# Altium PCB CH32F&V208W-R0.PcbDoc (part 2 of 3)
Units mm, origin at the board's own origin, x right, y up, seen from the top; angles counter-clockwise.
Board outline 86.5 x 95 mm, 2 copper layers (Top Layer, Bottom Layer); 65 components, 96 nets, 363 pads, 852 vias.
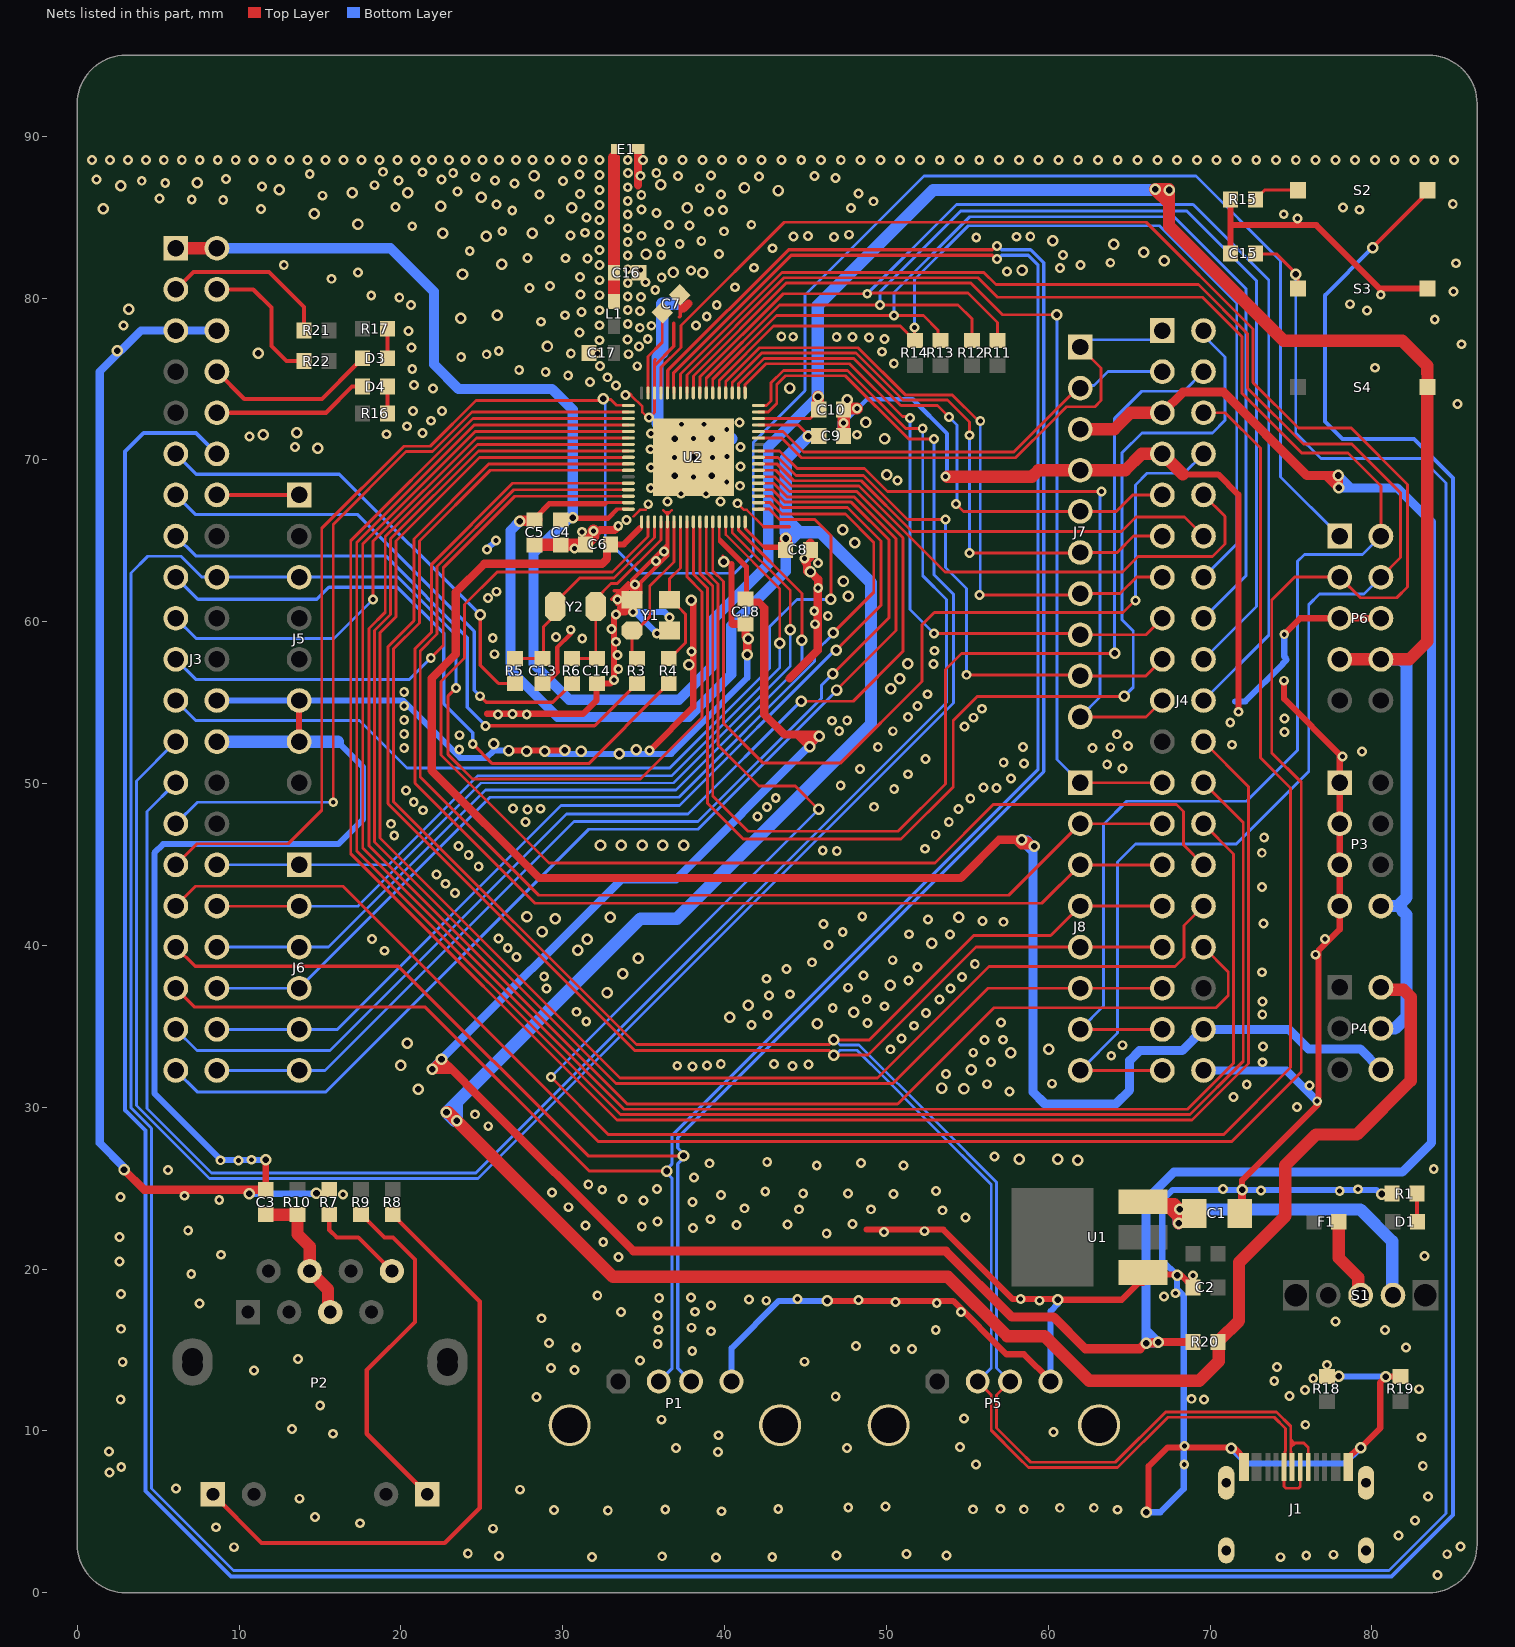
[diagram p2: the nets of this part, all layers, seen from the top]

## Via types
v1: diameter 0.61, hole 0.305, Top Layer to Bottom Layer, tented both sides, 680 vias
v2: diameter 0.711, hole 0.406, Top Layer to Bottom Layer, tented both sides, 172 vias

## Nets (pads, with @x,y where several pads share a name; then routed paths per layer and width w, separated by ;. In a path a pad name is that pad's centre, name@x,y a point inside that pad or via, vN(x,y) a via of type N, cw(c..) or ccw(c..) an arc to the next point about the centre after c; other vN are vias at no path point) (continued)
GND: C1.2 C2.2 C3.1 C4.2 C5.1 C6.2 C7.2 C8.2 C9.2 C10.1 C13.1 C14.1 C15.1 C16.1 C17.1 C18.2 E1.0 J1.0 J1.A1 J1.B1 J3.5 J3.6 J3.24 J3.26 J4.7 J4.38 J5.6 J5.7 J7.4 P1.0 P1.4 P3.1 P3.3 P3.5 P3.7 P5.0 P5.4 P6.5 P6.6 R1.1 R7.1 R15.1 R18.2 R19.2 S3.1 U1.1 U2.0 U2.5 U2.49 Y1.2 Y1.4 | length 514.3
  Top Layer w0.152: v1@34.149,74.1 34.22,74.029 34.22,73.983 34.917,73.286 34.917,72.942 35.248,72.611 v1(35.321,72.611) ; 34.35,66.5 34.359,66.5 34.766,66.907 35.135,66.907 ; 36.217,66.878 36.343,66.752 ; 36.352,66.761 36.343,66.752 ; 36.352,66.777 36.477,66.777 ; U2.5@36.468,66.186 36.468,66.627 36.343,66.752 ; 36.603,66.777 36.477,66.777 ; 36.728,66.887 36.477,66.636 36.477,66.777 ; U2.0@38.068,70.156 U2.0@39.211,69.012 U2.0@39.268,68.956 ; 39.884,64.086 40.419,63.551 ; 40.419,59.94 40.508,59.851 ; v1(40.79,67.317) 41.2,66.907 41.369,66.907 42.401,65.875
  Top Layer w0.178: 35.623,72.883 35.668,72.927
  Top Layer w0.203: 33.03,61.392 33.551,61.913 ; v1@33.164,61.513 33.321,61.513 34.027,62.219 v1@34.269,62.219 ; 33.172,61.913 33.551,61.913 ; v1(33.379,61.362) 33.411,61.362 v1@34.269,62.219 ; 34.046,62.408 33.551,61.913 ; 35.668,72.927 U2.49@35.668,74.138 ; U2.49@35.668,74.436 35.668,75.829 ; 35.712,76.207 35.668,76.162 35.668,75.829 ; 36.852,78.462 36.852,77.013 35.668,75.829 ; 37.198,78.825 37.255,78.882 37.255,79.086 ; 42.401,65.875 43.991,65.875 ; v1@34.269,62.219 34.283,62.234 34.346,62.297 v1(34.451,62.297) 34.373,62.219 34.283,62.219 v1@34.269,62.219 ; 37.255,79.086 C7.2@37.255,79.661 ; 37.255,79.086 37.455,79.286 37.455,79.358 37.455,79.461 C7.2@37.255,79.661 ; C7.2@37.255,79.661 37.238,79.679 C7.2@37.238,80.193 37.255,80.175 C7.2@37.255,79.661
  Top Layer w0.254: C13.1@28.757,56.185 C13.1@28.782,56.185 ; 29.656,58.414 v1@30.492,59.25 ; Y1.4@34.479,61.892 34.657,62.07 34.806,62.07 ; 36.468,65.134 36.468,64.772 ; U2.5@36.468,66.173 36.468,64.772 ; 34.806,62.07 34.806,62.433 36.468,64.094 36.468,64.772 ; 34.806,62.07 34.806,61.785 34.383,61.362 34.338,61.362 34.298,61.362 Y1.4@34.283,61.362 34.283,62.219 34.283,62.234 34.283,62.588 36.468,64.772
  Top Layer w0.305: 29.656,57.059 29.656,58.414
  Top Layer w0.381: C3.1@11.645,24.905 11.649,24.909 11.649,26.743 v2(11.652,26.747) ; J5.7@13.71,52.592 J5.6@13.71,55.132 ; 25.327,54.31 31.253,54.31 32.088,55.145 32.088,56.185 C14.1@32.114,56.185 32.943,56.185 v1(33.166,56.408) 33.166,60.345 v1(33.278,60.456) v1@33.472,60.65 ; v2(26.67,52.041) 30.223,52.041 v2@30.309,52.127 ; C13.1@28.757,56.033 29.63,56.906 ; v1@33.411,61.362 Y1.4@34.042,61.362 ; v1@33.418,61.144 Y1.4@33.824,61.144 ; 33.535,60.855 Y1.4@33.824,61.144 ; Y1.4@34.298,61.362 34.338,61.402 34.338,61.362 v1(34.338,60.599) ; v1(35.366,52.039) 38.062,54.735 v2@38.062,61.382 ; 40.419,59.94 40.419,63.551 ; v2(46.331,18.033) 54.115,18.033 57.415,14.733 58.491,14.733 60.138,13.087 P5.4@60.138,13.054 ; 48.768,22.435 53.51,22.435 57.806,18.139 v1(58.295,18.139) 60.555,18.139 v2(60.591,18.103) 64.543,18.103 65.589,19.149 U1.1@65.851,19.149 ; U1.1@65.851,19.784 65.969,19.667 v2@68.11,19.667 ; v2(66.052,4.971) 66.052,5.06 66.196,5.204 66.196,7.809 67.369,8.983 71.249,8.983 v2(71.309,8.923) ; v2@68.146,19.667 68.939,18.875 C2.2@68.939,18.865 ; 68.318,69.104 70.496,69.104 71.746,67.853 v1(71.746,54.436) ; C15.1@71.266,82.754 71.266,84.505 ; R15.1@71.266,86.089 71.266,84.505 ; v2@71.57,8.86 72.091,8.338 J1.A1@72.091,7.763 ; v2(71.975,24.89) 71.975,25.485 76.616,30.125 v1(76.616,30.372) ; v1(74.568,56.356) 74.568,55.226 78.077,51.717 v1@78.077,51.673 ; v1(74.582,59.222) 75.572,60.213 80.553,60.213 P6.6@80.554,60.212 ; v1@76.688,30.606 76.688,39.655 78.014,40.982 P3.7@78.014,42.432 P3.5@78.014,44.972 P3.3@78.014,47.512 P3.1@78.014,50.052 v1@78.014,51.673 ; R18.2@77.217,13.365 77.222,13.369 77.954,13.369 v2(77.958,13.374) ; J1.B1@78.541,7.763 78.541,8.338 79.107,8.904 79.241,8.904 v2(79.304,8.967) 80.509,10.172 80.509,12.99 v2(80.864,13.345) 80.874,13.355 81.758,13.355 R19.2@81.768,13.365 ; v2(80.603,24.635) 80.618,24.65 81.234,24.65 R1.1@81.249,24.665 ; S3.1@83.423,80.582 80.48,80.582 76.557,84.505 71.266,84.505 ; v1@33.472,60.65 Y1.4@33.966,61.144 ; v1@33.472,60.65 33.538,60.584 33.876,60.584 33.876,61.002 Y1.4@34.018,61.144 ; Y1.4@33.824,61.144 Y1.4@34.042,61.362 ; Y1.4@33.824,61.144 Y1.4@33.966,61.144 ; Y1.4@33.966,61.144 Y1.4@34.018,61.144 ; Y1.4@33.966,61.144 Y1.4@34.183,61.362 ; Y1.4@34.018,61.144 34.066,61.144 Y1.4@34.283,61.362 Y1.4@34.236,61.362 ; Y1.4@34.018,61.144 Y1.4@34.236,61.362 ; Y1.4@34.042,61.362 Y1.4@34.183,61.362 ; Y1.4@34.183,61.362 Y1.4@34.236,61.362
  Top Layer w0.508: v2(2.888,26.137) 4.119,24.905 C3.1@11.645,24.905 ; v1(31.9,65.612) 31.919,65.632 32.269,65.632 32.31,65.672 33.193,65.672 v1(33.429,65.908) ; Y1.4@34.283,61.362 34.319,61.326 34.319,60.618 v1(34.338,60.599) ; 34.653,86.972 E1.0@34.653,89.204 ; C16.1@34.654,81.613 C16.1@34.705,81.561 ; 37.455,79.358 37.764,79.666 ; 40.508,59.851 C18.2@41.291,59.851 v2@41.291,59.086 ; v2(41.402,57.963) 41.402,58.9 v2(41.451,58.949) ; 44.019,56.486 45.751,58.218 45.751,62.061 v1(45.782,62.092) 45.782,62.617 v2(45.305,63.094) ; v1(44.933,63.897) 45.226,63.897 45.314,63.985 45.314,64.881 C8.2@45.298,64.897 ; v1@44.993,63.663 45.085,63.571 v2@45.085,63.094 ; C1.2@71.821,23.44 71.975,23.594 v2(71.975,24.89)
  Top Layer w0.762: C5.1@28.252,64.751 28.265,64.763 31.39,64.763 C6.2@31.403,64.776 31.403,64.801 31.9,65.298 v1(31.9,65.612) ; C9.2@47.355,71.476 v1(47.355,72.289) C10.1@47.355,73.102 47.431,73.178 v1(48.176,73.178) ; v1@53.753,68.964 58.997,68.964 59.388,69.356 J7.4@61.97,69.356 64.754,69.356 65.77,70.372 J4.7@67.05,70.372 68.318,69.104
  Bottom Layer w0.254: v1(47.355,72.289) 48.811,73.745 51.625,73.745 53.753,71.617 v1@53.753,68.964
  Bottom Layer w0.381: J3.24@8.63,55.132 J5.6@13.71,55.132 20.102,55.132 23.652,51.581 25.277,51.581 25.737,52.041 v2(26.67,52.041) ; v2(10.625,24.652) 14.754,24.652 v2(14.78,24.678) ; v2(11.652,26.747) 8.877,26.747 4.771,30.853 4.771,45.718 5.317,46.264 16.138,46.264 17.664,47.79 17.664,51.013 16.085,52.592 ; v1(25.307,64.464) 25.854,65.011 v1(25.863,65.011) ; v2@29.158,51.834 36.712,51.834 41.402,56.524 v2(41.402,57.963) ; v1@33.454,61.349 33.485,61.318 33.619,61.318 v1(34.338,60.599) v1@34.489,60.599 ; v1(35.809,59.28) v1@34.489,60.599 ; v1@36.63,60.3 36.6,60.3 36.302,60.599 v1@34.489,60.599 ; P1.4@40.427,13.054 40.427,15.114 43.346,18.033 v2(46.331,18.033) ; P5.4@60.138,13.054 60.138,17.387 60.591,17.841 v2(60.591,18.103) ; v2(66.052,4.971) 66.93,4.971 68.37,6.41 68.37,18.35 67.958,18.762 v2(67.958,19.604) 67.046,20.516 67.046,24.251 67.685,24.89 v2(71.975,24.89) 80.27,24.89 80.525,24.635 v2(80.603,24.635) ; v2(71.309,8.923) 72.24,7.992 78.329,7.992 v2(79.304,8.967) ; 71.539,55.073 72.175,55.073 74.507,57.406 74.507,57.43 74.727,57.65 ; v1(74.582,59.222) 74.582,57.844 74.696,57.73 ; v2(77.958,13.374) 77.973,13.359 80.849,13.359 v2(80.864,13.345)
  Bottom Layer w0.508: v2(2.888,26.137) 2.888,26.282 1.388,27.781 1.388,75.45 3.93,77.992 J3.5@6.09,77.992 J3.6@8.63,77.992 ; J4.38@69.59,32.272 74.716,32.272 v1(76.616,30.372)
  Bottom Layer w0.762: J3.26@8.63,52.592 J5.7@13.71,52.592 16.085,52.592 ; 35.857,72.249 35.857,76.347 36.138,76.628 36.138,79.645 37.048,79.645 ; U2.0@39.211,71.299 40.41,71.299 ; 47.355,71.882 v1(47.355,72.289)
  other v1: 84.049,1.094 39.472,2.178 74.354,2.195 31.796,2.211 42.943,2.205 26.061,2.259 36.143,2.251 46.914,2.289 53.717,2.289 75.938,2.311 77.619,2.349 51.246,2.4 84.649,2.38 24.13,2.428 9.676,2.812 85.471,2.857 81.647,3.528 25.694,3.956 8.574,4.044 17.475,4.292 82.656,4.46 14.699,4.679 39.804,5.036 32.782,5.073 29.456,5.11 64.275,5.125 36.33,5.146 55.348,5.155 58.486,5.155 43.315,5.183 57.054,5.186 47.639,5.257 60.71,5.247 62.813,5.247 49.931,5.331 13.73,5.81 83.472,5.936 27.349,6.366 6.108,6.439 2.002,7.432 2.717,7.77 83.142,7.839 55.53,7.928 68.399,7.934 39.582,8.694 1.962,8.723 36.995,8.953 47.565,8.953 54.555,8.994 68.422,9.075 83.064,9.606 39.619,9.729 15.791,9.821 60.321,9.937 13.266,10.122 75.882,10.378 36.108,10.69 54.799,10.762 15.01,11.564 2.683,11.935 69.614,11.94 68.854,11.982 28.38,12.088 46.863,12.132 74.915,12.146 75.86,12.516 82.909,12.577 73.961,13.08 76.372,13.234 10.922,13.729 30.724,13.758 29.262,13.885 74.13,13.945 77.217,14.084 2.806,14.255 44.941,14.275 34.775,14.355 13.627,14.45 38,14.937 50.533,15.058 51.569,15.058 82.092,15.144 30.831,15.159 48.12,15.236 35.865,15.372 29.158,15.42 39.149,16.155 53.045,16.243 80.813,16.224 35.911,16.25 2.704,16.308 37.945,16.376 77.742,16.765 28.674,16.957 35.854,17.128 33.6,17.347 38.177,17.36 54.61,17.344 39.157,17.747 7.555,17.877 53.109,17.897 50.559,17.971 42.571,18.043 59.453,18.045 48.267,18.082 41.504,18.119 44.498,18.156 35.956,18.2 37.931,18.231 67.142,18.308 32.132,18.369 2.697,18.457 67.864,18.506 68.939,19.609 7.042,19.685 2.615,20.464 33.436,20.746 83.246,20.812 8.878,20.883 32.499,21.682 2.615,21.982 46.308,22.186 49.841,22.278 52.361,22.339 6.853,22.385 38.045,22.532 34.883,22.619 31.407,22.686 40.727,22.722 43.892,22.753 47.9,22.789 35.848,22.94 39.118,23.077 54.882,23.177 53.467,23.63 44.587,23.691 49.043,23.691 41.238,23.753 30.359,23.823 38.025,24.154 34.989,24.244 8.771,24.276 33.69,24.339 2.67,24.449 6.621,24.53 39.784,24.573 16.415,24.613 50.425,24.644 44.856,24.678 47.62,24.678 29.341,24.73 42.512,24.783 53.057,24.819 78.006,24.832 73.14,24.863 32.437,24.901 79.145,24.93 35.818,24.947 70.8,24.937 31.577,25.218 38.105,25.656 5.604,26.125 83.817,26.176 45.694,26.401 51.05,26.4 39.063,26.534 48.436,26.56 42.632,26.614 9.969,26.702 8.858,26.719 10.768,26.754 56.68,26.953 25.396,28.827 24.579,29.561 75.359,30.02 71.446,30.625 57.596,30.979 76.131,31.334 72.264,31.403 56.222,31.423 60.23,31.452 53.676,32.052 38.021,32.509 44.204,32.55 37.073,32.56 38.917,32.569 45.174,32.65 43.06,32.675 39.763,32.679 56.451,32.796 73.233,32.78 63.892,33.181 55.364,33.368 50.257,33.578 73.263,33.742 64.581,33.831 56.051,34.155 57.209,34.169 50.927,34.257 51.701,35.034 41.665,35.071 48.82,35.207 57.081,35.228 31.45,35.306 42.657,35.706 73.224,35.738 52.441,35.812 30.841,35.896 46.683,36.13 49.882,36.24 73.23,36.536 48.779,36.668 53.266,36.666 42.733,36.902 44.041,36.98 28.998,37.324 53.965,37.341 47.621,37.385 51.354,37.828 42.581,37.937 54.66,38.054 28.852,38.082 48.579,38.149 73.208,38.341 43.813,38.548 51.91,38.662 55.459,38.853 45.395,38.955 50.386,39.085 27.137,39.282 76.511,39.425 18.991,39.666 26.6,39.831 46.426,40.013 77.105,40.39 18.203,40.401 26.027,40.429 53.921,40.673 51.398,40.686 47.3,40.822 46.118,41.311 73.303,41.361 57.231,41.456 55.942,41.508 52.563,41.608 48.502,41.782 23.331,43.245 73.202,43.596 22.748,43.807 22.196,44.39 24.804,44.878 24.187,45.577 73.193,45.721 46.065,45.86 46.932,45.836 52.379,45.972 23.546,46.136 73.34,46.659 19.585,46.79 53.043,46.838 19.385,47.513 27.702,47.63 53.853,47.614 42.043,47.96 21.367,48.35 27.81,48.395 54.46,48.424 28.633,48.444 26.93,48.453 42.616,48.56 49.239,48.562 20.79,48.856 55.18,49.077 43.157,49.116 20.305,49.561 50.479,49.669 56.804,49.721 55.998,49.747 47.172,49.88 57.698,50.301 51.335,50.574 48.373,50.9 64.579,50.936 63.641,51.177 58.504,51.232 57.244,51.308 52.402,51.527 78.183,51.673 79.392,51.969 23.602,52.099 20.2,52.197 62.733,52.205 63.831,52.245 49.466,52.261 58.441,52.265 64.92,52.324 71.349,52.397 23.615,52.988 64.25,53.043 20.2,53.063 74.604,53.178 47.079,53.247 50.392,53.235 54.82,53.53 71.241,53.769 46.624,53.88 47.574,53.904 20.2,53.928 74.595,54.03 55.388,54.069 51.34,54.102 25.986,54.277 26.889,54.286 27.773,54.268 55.91,54.621 20.2,54.794 51.921,54.797 52.526,55.516 20.2,55.66 33.431,57.085 52.899,57.387 33.389,57.95 25.779,57.993 37.964,58.163 52.959,58.204 33.279,58.758 25.67,58.985 31.201,58.973 29.576,59.053 30.492,59.504 33.01,59.551 45.595,59.845 36.583,60.266 46.376,60.345 45.539,60.662 25.378,61.462 25.915,61.854 45.763,63.633 35.76,63.745 36.248,64.349 30.714,64.535 31.192,65.555 33.936,66.276 35.28,67.261 36.475,67.437 39.752,67.432 37.314,67.905 38.862,67.905 35.434,68.268 40.96,68.398 40.129,68.636 50.681,68.722 38.068,68.936 53.651,68.964 35.447,69.526 40.988,69.59 36.899,70.156 39.261,70.156 40.149,70.22 35.431,70.657 13.448,70.791 40.989,70.805 38.068,71.324 10.643,71.446 48.176,71.552 19.118,71.585 35.455,71.636 21.322,71.666 40.129,71.88 20.365,72.076 37.344,72.2 38.73,72.2 40.919,72.308 21.858,72.416 20.748,73.012 22.537,73.023 85.277,73.448 33.87,73.999 21.969,74.409 33.286,74.585 20.805,74.626 31.675,74.812 32.762,75.101 30.335,75.21 28.943,75.438 27.307,75.562 20.698,75.62 80.181,75.693 32.306,75.797 34.601,75.789 50.453,75.948 23.723,76.356 25.299,76.523 34.065,76.53 30.494,76.58 32.154,76.584 49.72,76.681 26.044,76.734 20.649,76.945 34.709,77.002 85.537,77.145 32.272,77.39 34.009,77.449 35.251,77.478 49.885,77.478 48.923,77.56 44.237,77.606 46.926,77.588 47.906,77.597 43.501,77.622 31.025,77.873 20.475,77.957 34.759,78.162 35.468,78.287 2.861,78.303 32.272,78.318 38.223,78.312 34.012,78.406 28.651,78.533 83.879,78.664 38.897,78.851 30.13,78.934 31.157,79.143 34.767,79.197 79.693,79.23 32.272,79.246 34.012,79.25 39.513,79.56 20.627,79.58 78.644,79.62 19.899,80.036 34.831,80.068 34.012,80.094 18.163,80.149 32.272,80.175 31.084,80.222 80.544,80.203 85.033,80.396 35.712,80.488 27.952,80.616 40.647,80.668 29.204,80.746 34.012,80.938 35.121,80.976 32.272,81.103 15.715,81.189 36.112,81.275 31.052,81.305 17.345,81.581 57.445,81.636 37.934,81.697 34.817,81.743 34.012,81.782 60.734,81.847 41.805,81.871 12.762,82.032 32.272,82.031 62.001,82.034 85.195,82.149 63.832,82.179 30.178,82.458 31.525,82.44 27.821,82.463 34.012,82.625 36.086,82.663 60.898,82.655 39.642,82.725 24.25,82.903 32.272,82.96 42.966,83.075 37.224,83.341 34.012,83.469 36.025,83.47 38.559,83.524 55.549,83.748 46.755,83.773 44.249,83.799 58.026,83.787 58.889,83.803 34.859,83.846 45.152,83.839 30.476,83.866 32.272,83.888 47.679,83.914 31.376,84.034 26.259,84.126 39.97,84.124 34.012,84.313 20.697,84.436 37.821,84.472 36.562,84.522 41.648,84.528 32.272,84.816 29.175,84.85 75.401,84.913 31.458,84.98 34.012,85.157 74.548,85.175 35.794,85.257 39.031,85.352 26.876,85.405 39.895,85.446 79.22,85.454 34.866,85.481 11.346,85.505 47.798,85.573 78.22,85.601 19.658,85.622 32.272,85.744 25.914,85.791 84.995,85.815 49.2,85.978 34.012,86.001 9.017,86.051 7.074,86.09 5.083,86.148 15.151,86.324 34.851,86.375 39.776,86.391 28.562,86.407 31.062,86.422 48.265,86.449 23.494,86.573 32.272,86.673 38.462,86.786 34.012,86.845 11.419,86.883 18.369,86.972 27.021,87.089 5.435,87.114 30.013,87.221 3.984,87.244 25.801,87.259 19.856,87.269 1.188,87.322 22.507,87.322 9.181,87.348 46.85,87.417 24.611,87.466 42.123,87.513 34.792,87.552 37.111,87.545 45.549,87.551 39.159,87.574 32.272,87.601 31.042,87.64 14.362,87.669 23.227,87.716 34.024,87.724 35.777,87.727 21.335,87.771 18.891,87.8 0.906,88.529 2.016,88.529 3.126,88.529 4.237,88.529 5.347,88.529 6.457,88.529 7.567,88.529 8.678,88.529 9.788,88.529 10.898,88.529 12.009,88.529 13.119,88.529 14.229,88.529 15.339,88.529 16.45,88.529 17.56,88.529 18.67,88.529 19.78,88.529 20.891,88.529 21.925,88.529 22.96,88.529 23.995,88.529 25.029,88.529 26.064,88.529 27.099,88.529 28.133,88.529 29.168,88.529 30.203,88.529 31.238,88.529 32.272,88.529 34.012,88.532 34.956,88.532 36.178,88.532 37.401,88.532 38.623,88.532 39.845,88.532 41.068,88.532 42.29,88.532 43.512,88.532 44.735,88.532 45.957,88.532 47.179,88.532 48.402,88.532 49.624,88.532 50.846,88.532 52.069,88.532 53.291,88.532 54.513,88.532 55.736,88.532 56.958,88.532 58.18,88.532 59.403,88.532 60.625,88.532 61.847,88.532 63.07,88.532 64.292,88.532 65.514,88.532 66.737,88.532 67.959,88.532 69.181,88.532 70.404,88.532 71.626,88.532 72.848,88.532 74.071,88.532 75.293,88.532 76.515,88.532 77.738,88.532 78.96,88.532 80.183,88.532 81.405,88.532 82.627,88.532 83.85,88.532 85.072,88.532
  other v2: 61.817,26.734 58.213,26.793 60.576,26.793 21.082,31.111 54.791,31.152 53.421,31.186 55.236,32.316 19.985,32.58 57.667,33.354 60.03,33.569 20.38,33.939 45.724,35.155 40.325,35.552 47.969,35.88 41.453,36.304 32.733,37.079 50.244,37.547 33.694,38.257 34.665,39.198 30.916,39.69 52.793,40.124 31.519,40.385 28.716,40.842 29.526,41.652 32.941,41.734 54.456,41.731 27.787,41.772 32.33,46.195 33.616,46.195 34.903,46.195 36.189,46.195 37.475,46.195 33.48,51.848 27.76,51.992 28.88,52 31.127,51.998 30.117,52.048 34.541,52.08 25.724,52.454 50.261,55.869 50.815,56.465 37.797,57.336 51.325,57.401 37.938,61.319 47.639,61.58 47.345,62.49 39.944,63.715 48.051,64.871 47.3,65.682 50.016,69.086 14.857,70.728 49.88,71.308 11.494,71.558 13.558,71.673 48.719,72.31 47.565,73.727 44.031,74.44 11.181,76.589 2.46,76.751 29.053,77.007 23.698,78.745 25.953,78.933 3.189,79.301 23.803,81.481 38.651,81.561 36.821,81.579 58.377,81.704 26.236,82.087 67.161,82.315 35.143,82.711 65.897,82.826 64.041,83.31 60.263,83.532 25.261,83.815 22.582,84.014 28.119,84.014 17.345,84.557 14.638,85.207 1.598,85.508 37.696,85.565 30.547,85.588 22.454,85.674 24.957,86.231 16.993,86.505 20.409,86.518 43.316,86.642 12.49,86.696 41.227,86.813 2.682,86.933 36.053,87.003 7.401,87.126 28.223,87.548
KEY: J3.12 S2.1 | length 246.4
  Top Layer w0.254: v2(80.045,83.111) 80.045,83.131 83.467,86.553 83.389,86.631 S2.1@83.423,86.665
  Bottom Layer w0.254: J3.12@8.63,70.372 7.335,71.667 4.105,71.667 2.952,70.515 2.952,29.815 4.217,28.55 4.217,6.284 9.502,1 81.209,1 85.001,4.792 85.001,68.891 82.597,71.296 78.186,71.296 77.103,72.378 77.103,80.17 v2(80.045,83.111)
LED1: D3.2 J3.8 | length 10.8
  Top Layer w0.254: J3.8@8.63,75.452 10.316,73.765 15.119,73.765 17.267,75.914 17.292,75.914 17.63,76.252 D3.2@17.63,76.277
LED2: D4.2 J3.10 | length 9.7
  Top Layer w0.254: J3.10@8.63,72.912 15.371,72.912 16.983,74.524 D4.2@17.63,74.524
NetC3_2: C3.2 P2.4 P2.5 R10.1 | length 8.9
  Top Layer w0.762: C3.2@11.645,23.365 R10.1@13.607,23.365 ; R10.1@13.591,23.349 R10.1@13.607,23.365 ; P2.5@15.63,17.336 15.489,17.477 15.489,18.747 P2.4@14.36,19.876 14.36,21.393 13.607,22.146 R10.1@13.607,23.365
NetC16_2: C16.2 E1.1 L1.2 | length 8.9
  Top Layer w0.714: L1.2@33.165,79.784 33.165,88.684
NetD1_2: D1.2 R1.2 | length 1.8
  Top Layer w0.254: R1.2@82.789,24.665 82.789,22.957 D1.2@82.824,22.922
NetD3_1: D3.1 R17.2 | length 1.8
  Top Layer w0.254: D3.1@19.17,76.277 R17.2@19.17,78.105
NetD4_1: D4.1 R16.2 | length 1.7
  Top Layer w0.254: R16.2@19.17,72.873 D4.1@19.17,74.524
NetF1_2: F1.2 S1.1 | length 5
  Top Layer w0.762: F1.2@77.947,22.922 77.947,20.68 79.154,19.473 79.154,18.74 S1.1@79.36,18.534
NetJ3_3: J3.3 R21.2 | length 10.7
  Top Layer w0.254: J3.3@6.09,80.532 7.169,81.611 11.854,81.611 14.014,79.451 R21.2@14.014,78.004
NetJ3_4: J3.4 R22.1 | length 8.6
  Top Layer w0.254: J3.4@8.63,80.532 10.875,80.532 12,79.406 12,77.035 12.937,76.099 R22.1@14.014,76.099
NetJ3_14: J3.14 J5.1 | length 5.1
  Top Layer w0.254: J3.14@8.63,67.832 J5.1@13.71,67.832
NetP2_8: P2.8 R7.2 | length 5.9
  Top Layer w0.254: R7.2@15.57,23.365 15.57,22.417 16.035,21.952 17.364,21.952 P2.8@19.44,19.876
NetP2_9: P2.9 R8.2 | length 39
  Top Layer w0.254: P2.9@8.375,6.084 11.387,3.073 22.707,3.073 24.869,5.235 24.869,17.99 19.857,23.002 19.857,23.027 19.519,23.365 R8.2@19.494,23.365
NetP2_12: P2.12 R9.2 | length 21.8
  Top Layer w0.254: R9.2@17.532,23.365 17.557,23.365 18.972,21.949 19.497,21.949 20.857,20.59 20.857,16.723 17.887,13.753 17.887,9.823 P2.12@21.625,6.084
NetR15_2: R15.2 S2.2 | length 2.9
  Top Layer w0.178: R15.2@72.806,86.089 72.806,86.114 73.358,86.665 S2.2@75.423,86.665
NRST: C15.2 J3.18 J5.3 S3.2 U2.8 | length 289.2
  Top Layer w0.178: v1(23.411,55.914) 22.918,55.421 22.918,51.784 24.43,50.272 34.795,50.272 38.604,54.082 38.604,61.842 37.668,62.779 U2.8@37.668,66.173 ; C15.2@72.806,82.754 72.828,82.732 74.09,82.732 75.289,81.533 v2(75.289,81.482) 75.423,81.347 S3.2@75.423,80.582
  Bottom Layer w0.178: v1(23.411,55.914) 23.411,59.151 19.811,62.752 J5.3@13.71,62.752 J3.18@8.63,62.752 8.617,62.765 7.69,62.765 6.412,64.043 4.357,64.043 3.321,63.006 3.321,29.968 4.593,28.696 4.593,6.43 9.655,1.368 81.056,1.368 84.573,4.885 84.573,68.574 83.059,70.088 76.846,70.088 75.289,71.645 v2(75.289,81.482)
PA0: J3.32 J6.1 U2.14 | length 50.2
  Top Layer w0.152: U2.14@40.068,66.173 40.068,65.377 43.414,62.03 43.414,58.677 v2(43.419,58.672)
  Bottom Layer w0.152: J3.32@8.63,44.972 J6.1@13.71,44.972 19.236,44.972 24.751,50.487 36.74,50.487 43.414,57.161 43.414,58.667 v2(43.419,58.672)
PA1: J3.34 J6.2 U2.15 | length 52
  Top Layer w0.152: J3.34@8.63,42.432 J6.2@13.71,42.432 ; U2.15@40.468,66.173 40.468,65.518 44.062,61.923 v2(44.062,59.499)
  Bottom Layer w0.152: J6.2@13.71,42.432 17.355,42.432 24.956,50.033 36.841,50.033 44.062,57.254 v2(44.062,59.499)
PA2: J3.36 J6.3 U2.16 | length 53.8
  Top Layer w0.178: U2.16@40.868,66.173 40.868,65.654 44.777,61.745 v2(44.777,58.841)
  Bottom Layer w0.178: J3.36@8.63,39.892 J6.3@13.71,39.892 15.514,39.892 25.233,49.61 37.002,49.61 44.777,57.385 v2(44.777,58.841)
PA3: J3.38 J6.4 U2.19 | length 62.3
  Top Layer w0.178: U2.19@42.085,67.356 42.823,67.356 43.529,66.65 47.467,66.65 49.216,64.901 49.216,61.825 v2(46.712,59.32)
  Bottom Layer w0.178: J3.38@8.63,37.352 J6.4@13.71,37.352 25.509,49.15 36.615,49.15 37.174,49.15 45.556,57.532 45.556,58.092 46.712,59.248 v2(46.712,59.32)
PA4: J3.40 J6.5 U2.20 | length 64.6
  Top Layer w0.178: U2.20@42.085,67.756 42.89,67.756 43.59,67.056 47.59,67.056 49.665,64.981 49.665,61.015 46.9,58.249 v2(46.9,58.232)
  Bottom Layer w0.178: J3.40@8.63,34.812 J6.5@13.71,34.812 16.064,34.812 29.889,48.636 37.207,48.636 46.803,58.232 v2(46.9,58.232)
PA5: J3.42 J6.6 U2.21 | length 67.8
  Top Layer w0.178: U2.21@42.085,68.156 42.957,68.156 43.726,67.387 47.82,67.387 50.167,65.04 50.167,60.26 v2(46.684,56.777)
  Bottom Layer w0.178: J3.42@8.63,32.272 J6.6@13.71,32.272 15.309,32.272 30.686,47.648 38.359,47.648 45.985,55.274 45.985,56.077 v2(46.684,56.777)
PA6: J3.41 U2.22 | length 72.5
  Top Layer w0.178: U2.22@42.085,68.556 43.024,68.556 43.863,67.717 48.001,67.717 50.593,65.126 50.593,59.457 v2(46.914,55.778)
  Bottom Layer w0.178: J3.41@6.09,32.272 7.411,30.95 15.375,30.95 31.6,47.175 38.353,47.175 46.914,55.736 v2(46.914,55.778)
PA7: J3.39 U2.23 | length 73.2
  Top Layer w0.178: U2.23@42.085,68.956 43.091,68.956 44,68.047 48.168,68.047 51.032,65.183 51.032,58.17 47.948,55.086 v2(44.744,55.086)
  Bottom Layer w0.178: J3.39@6.09,34.812 7.399,33.503 15.607,33.503 30.224,48.12 37.741,48.12 44.707,55.086 v2(44.744,55.086)
PA8: J4.23 J8.1 U2.43 | length 61.3
  Top Layer w0.178: U2.43@38.068,74.138 38.068,75.181 43.811,80.925 55.206,80.925 57.161,78.97 v2(60.533,78.97) ; J8.1@61.97,50.052 J4.23@67.05,50.052
  Bottom Layer w0.178: v2(60.533,78.97) 60.533,51.488 J8.1@61.97,50.052
PA9: J4.35 J8.7 P6.2 U2.44 | length 106.7
  Top Layer w0.178: U2.44@37.668,74.138 37.668,75.248 43.674,81.255 55.663,81.255 56.866,80.052 69.522,80.052 71.979,77.595 71.979,74.093 75.657,70.416 78.525,70.416 80.554,68.387 80.554,65.519 P6.2@80.554,65.292 ; J8.7@61.97,34.812 J4.35@67.05,34.812
  Bottom Layer w0.178: J8.7@61.97,34.812 63.419,36.261 63.419,47.473 64.849,48.904 72.247,48.904 75.388,52.045 75.388,63.711 75.828,64.15 79.413,64.15 P6.2@80.554,65.292
PA10: J4.37 J8.8 P6.4 U2.45 | length 110.1
  Top Layer w0.178: U2.45@37.268,74.138 37.268,75.315 43.538,81.585 56.017,81.585 56.769,80.833 69.276,80.833 72.314,77.795 72.314,74.43 75.766,70.978 78.75,70.978 81.761,67.967 81.761,63.958 P6.4@80.554,62.752 ; J8.8@61.97,32.272 J4.37@67.05,32.272
  Bottom Layer w0.178: J8.8@61.97,32.272 64.279,34.581 64.279,45.159 65.382,46.262 71.619,46.262 76.097,50.74 76.097,61.045 76.764,61.712 79.515,61.712 P6.4@80.554,62.752
PA11: J3.37 P1.2 U2.46 | length 141.4
  Top Layer w0.203: J3.37@6.09,37.352 7.254,36.188 21.505,36.188 31.636,26.058 v2(36.425,26.058) ; U2.46@36.868,74.138 36.868,74.435 36.845,74.457 36.845,75.378 44.104,82.637 56.525,82.637 ; 56.53,82.637 56.748,82.419 v1(56.823,82.419)
  Bottom Layer w0.203: P1.2@35.927,13.054 36.75,13.876 36.75,25.595 36.425,25.92 v2(36.425,26.058) 36.425,26.195 36.75,26.52 ; 36.75,26.742 36.75,26.52 ; v1(56.823,82.419) 56.898,82.419 57.115,82.637 58.758,82.637 59.367,82.028 59.367,50.886 36.75,28.269 36.75,26.52
PA12: J3.35 P1.3 U2.47 | length 144.3
  Top Layer w0.203: J3.35@6.09,39.892 7.276,38.706 19.842,38.706 31.559,26.988 v2(37.459,26.988) ; U2.47@36.468,74.138 36.468,74.435 36.49,74.457 36.49,75.525 43.957,82.992 56.525,82.992 ; 56.53,82.992 56.748,83.209 v1(56.823,83.209)
  Bottom Layer w0.203: 37.105,27.686 37.105,27.479 ; P1.3@37.927,13.054 37.105,13.876 37.105,26.497 37.459,26.851 v2(37.459,26.988) 37.459,27.126 37.105,27.479 ; v1(56.823,83.209) 56.898,83.209 57.115,82.992 58.906,82.992 59.723,82.175 59.723,50.739 37.105,28.121 37.105,27.479
PA13: J3.33 P6.3 U2.48 | length 185.2
  Top Layer w0.178: J3.33@6.09,42.432 7.308,43.65 16.416,43.65 32.175,27.892 71.347,27.892 75.629,32.174 75.629,50.076 73.811,51.894 73.811,61.34 75.222,62.752 P6.3@78.014,62.752 79.287,61.479 81.535,61.479 82.194,62.139 82.194,68.484 78.717,71.961 75.453,71.961 72.644,74.771 72.644,78.095 66.054,84.684 43.686,84.684 37.512,78.511 37.296,78.294 37.296,76.952 36.088,75.744 ; U2.48@36.068,74.138 36.068,75.744
PA14: J3.31 P6.1 U2.52 | length 139.9
  Top Layer w0.178: J3.31@6.09,44.972 7.4,46.282 13.035,46.282 15.106,48.354 15.106,65.769 20.182,70.845 21.813,70.845 24.638,73.669 32.505,73.669 v2@32.509,73.669 ; v2(32.505,73.771) 32.557,73.72 32.979,73.72 33.321,73.378 33.722,73.378 33.744,73.356 U2.52@34.05,73.356
  Bottom Layer w0.178: v2(32.505,73.771) 32.607,73.669 32.607,73.414 32.621,73.4 32.621,65.146 34.774,62.993 40.614,62.993 41.766,64.145 41.766,71.072 44.97,74.276 44.97,80.182 52.32,87.532 69.129,87.532 74.355,82.306 74.355,68.951 P6.1@78.014,65.292
PA15: J3.29 U2.53 | length 48.6
  Top Layer w0.178: v1(15.816,48.844) 15.816,66.012 20.318,70.514 21.95,70.514 24.391,72.956 U2.53@34.05,72.956
  Bottom Layer w0.178: J3.29@6.09,47.512 7.422,48.844 v1(15.816,48.844)
PB0: J4.17 J7.9 U2.26 | length 36
  Top Layer w0.178: U2.26@42.085,70.156 43.292,70.156 44.41,69.038 48.579,69.038 51.297,66.319 v1(53.656,66.319) ; v1(54.951,56.719) 61.477,56.719 61.597,56.599 61.812,56.814 J7.9@61.97,56.656 66.034,56.656 J4.17@67.05,57.672
  Bottom Layer w0.178: v1(53.656,66.319) 53.656,63.35 54.951,62.054 v1(54.951,56.719)
PB1: J4.19 J7.10 U2.27 | length 42.2
  Top Layer w0.178: U2.27@42.085,70.556 43.398,70.556 44.484,69.469 48.638,69.469 50.07,68.037 v1(63.288,68.037) ; J7.10@61.97,54.116 66.034,54.116 J4.19@67.05,55.132
  Bottom Layer w0.178: J7.10@61.97,54.116 63.198,55.344 63.198,67.743 63.206,67.75 63.206,67.954 v1(63.288,68.037)
PB3: J4.32 U2.58 | length 103
  Top Layer w0.178: U2.58@34.05,70.956 24.726,70.956 19.028,65.258 19.028,60.582 18.031,59.585 18.031,46.153 33.981,30.203 50.694,30.203 56.64,36.149 70.363,36.149 71.12,36.907 71.12,38.361 J4.32@69.59,39.892
PB4: J4.33 J8.6 U2.59 | length 93.4
  Top Layer w0.178: U2.59@34.05,70.556 24.793,70.556 19.358,65.121 19.358,60.445 18.371,59.458 18.371,46.381 33.286,31.466 34.881,31.466 50.385,31.466 56.271,37.352 J8.6@61.97,37.352 J4.33@67.05,37.352
PB5: J4.30 U2.60 | length 97.9
  Top Layer w0.178: U2.60@34.05,70.156 24.86,70.156 19.688,64.984 19.688,60.309 18.701,59.321 18.701,46.628 33.533,31.796 49.443,31.796 56.342,38.695 67.821,38.695 68.378,39.252 68.378,41.22 J4.30@69.59,42.432
PB6: J1.A7 J1.B7 J4.31 J8.5 P5.2 U2.61 | length 145
  Top Layer w0.178: U2.61@34.05,69.756 25.45,69.756 20.809,65.114 20.809,60.064 19.198,58.453 19.198,48.756 34.445,33.509 46.462,33.509 46.673,33.298 v2(46.753,33.218) 48.859,33.218 55.533,39.892 J8.5@61.97,39.892 J4.31@67.05,39.892 ; P5.2@55.638,13.054 56.473,12.219 56.473,10.041 58.138,8.375 58.781,7.732 64.277,7.732 67.392,10.846 73.96,10.846 74.651,10.155 74.651,8.75 74.627,8.726 74.627,7.824 J1.B7@74.566,7.763 74.566,6.57 74.68,6.457 75.462,6.457 75.566,6.561 J1.A7@75.566,7.763
  Bottom Layer w0.178: v2(46.753,33.218) 46.82,33.218 47.124,33.522 48.175,33.522 48.966,32.732 49.192,32.506 52.788,28.91 56.473,25.225 56.473,13.889 P5.2@55.638,13.054
PB7: J1.A6 J1.B6 J4.29 J8.4 P5.3 U2.62 | length 144.7
  Top Layer w0.178: U2.62@34.05,69.356 25.517,69.356 21.139,64.978 21.139,59.927 19.528,58.316 19.528,48.893 34.555,33.866 46.462,33.866 v2(46.753,34.157) 48.938,34.157 55.39,40.608 60.147,40.608 J8.4@61.97,42.432 J4.29@67.05,42.432 ; P5.3@57.638,13.054 56.803,12.219 56.803,10.177 58.258,8.722 58.918,8.062 64.141,8.062 67.255,11.176 74.097,11.176 74.981,10.292 74.981,9.447 ; J1.A6@75.066,7.763 75.005,7.824 75.005,8.726 74.981,8.75 74.981,8.995 ; J1.B6@76.066,7.763 76.066,8.967 75.793,9.24 75.226,9.24 ; 74.981,8.995 74.981,9.24 ; 74.981,8.995 75.226,9.24 ; 74.981,9.24 75.189,9.24 ; 74.981,9.24 74.981,9.447 ; 74.981,9.447 75.189,9.24 ; 75.189,9.24 75.226,9.24
  Bottom Layer w0.178: v2(46.753,34.157) 46.82,34.157 47.124,33.853 48.312,33.853 53.118,29.047 56.803,25.362 56.803,13.889 P5.3@57.638,13.054
PB8: J4.27 J8.3 U2.64 | length 78.4
  Top Layer w0.178: U2.64@34.05,68.556 26.9,68.556 21.898,63.554 21.898,59.37 20.862,58.334 20.862,50.023 28.282,42.603 59.601,42.603 J8.3@61.97,44.972 J4.27@67.05,44.972
PB9: J4.25 J8.2 U2.65 | length 77.9
  Top Layer w0.178: U2.65@34.05,68.156 26.967,68.156 22.228,63.417 22.228,59.233 21.192,58.197 21.192,50.413 28.511,43.094 57.552,43.094 J8.2@61.97,47.512 J4.25@67.05,47.512
PB10: J4.1 J7.1 U2.29 | length 32.5
  Top Layer w0.178: U2.29@42.085,71.356 43.532,71.356 44.758,70.13 57.982,70.13 60.191,72.34 61.131,73.279 62.884,73.279 63.265,73.66 63.265,75.681 J7.1@61.97,76.976
  Bottom Layer w0.178: J7.1@61.97,76.976 62.415,77.421 66.479,77.421 J4.1@67.05,77.992
PB11: J4.3 J7.2 U2.30 | length 27.5
  Top Layer w0.178: U2.30@42.085,71.756 43.605,71.756 44.875,70.485 57.87,70.485 61.821,74.436 J7.2@61.97,74.436
  Bottom Layer w0.178: J7.2@61.97,74.436 62.134,74.6 62.832,74.6 63.683,75.452 J4.3@67.05,75.452
PB12: J4.15 J7.8 U2.35 | length 41.2
  Top Layer w0.178: U2.35@41.268,74.138 41.268,74.645 42.562,75.94 47.72,75.94 50.984,72.676 51.37,72.676 v1(51.452,72.593) ; v1(52.945,59.265) 61.748,59.265 61.894,59.12 J7.8@61.97,59.196 66.034,59.196 J4.15@67.05,60.212
  Bottom Layer w0.178: v1(51.452,72.593) 51.452,60.758 v1(52.945,59.265)
PB13: J4.9 J7.5 U2.36 | length 34.7
  Top Layer w0.178: U2.36@40.868,74.138 40.868,74.712 42.425,76.27 47.977,76.27 50.887,73.36 53.152,73.36 v1(53.867,72.644) ; v1(54.304,67.266) 54.754,66.816 64.205,66.816 65.221,67.832 J4.9@67.05,67.832
  Bottom Layer w0.178: v1(53.867,72.644) 54.35,72.161 54.35,67.312 v1(54.304,67.266)
PB14: J4.11 J7.6 U2.37 | length 38.4
  Top Layer w0.178: U2.37@40.468,74.138 40.468,74.779 42.289,76.6 48.113,76.6 51.024,73.69 53.781,73.69 55.13,72.34 v1(55.13,71.52) ; v1(55.13,64.236) 61.759,64.236 61.844,64.15 J7.6@61.97,64.276 64.258,64.276 65.274,65.292 J4.11@67.05,65.292
  Bottom Layer w0.178: v1(55.13,64.236) v1(55.13,71.52)
PB15: J4.13 J7.7 U2.38 | length 41.7
  Top Layer w0.178: U2.38@40.068,74.138 40.068,74.846 42.152,76.931 48.25,76.931 51.161,74.02 54.06,74.02 55.681,72.399 v1(55.798,72.399) ; v1(55.754,61.641) 61.875,61.641 J7.7@61.97,61.736 64.431,61.736 65.447,62.752 J4.13@67.05,62.752
  Bottom Layer w0.178: v1(55.754,61.641) 55.798,61.685 v1(55.798,72.399)
PC0: J4.2 U2.9 | length 79.3
  Top Layer w0.178: U2.9@38.068,66.173 38.068,62.932 38.934,62.065 38.934,48.784 41.149,46.569 50.907,46.569 54.13,49.793 54.13,53.901 55.619,55.389 v2(64.689,55.389)
  Bottom Layer w0.178: v2(64.689,55.389) 65.253,55.954 65.253,59.432 64.563,60.122 64.563,70.444 65.788,71.668 70.14,71.668 70.917,72.446 70.917,76.36 69.59,77.687 J4.2@69.59,77.992
PC1: J4.4 U2.10 | length 72.9
  Top Layer w0.178: U2.10@38.468,66.173 38.468,62.999 39.265,62.202 39.265,49.221 41.437,47.049 50.719,47.049 53.642,49.973 53.642,57.043 54.627,58.028 64.078,58.028 v2(64.102,58.052)
  Bottom Layer w0.178: v2(64.102,58.052) 64.102,72.568 65.777,74.243 68.382,74.243 J4.4@69.59,75.452
PC2: J4.6 U2.11 | length 137.7
  Top Layer w0.178: v1(29.262,31.864) 32.809,28.317 70.838,28.317 74.968,32.447 74.968,49.727 73.104,51.591 73.104,70.728 70.92,72.912 J4.6@69.59,72.912 ; U2.11@38.868,66.173 38.868,63.066 39.595,62.339 39.595,52.371 42.128,49.838 44.368,49.838 v2(45.808,48.398)
  Bottom Layer w0.178: v1(29.262,31.864) 29.273,31.864 v2(45.808,48.398)
PC3: J4.8 U2.12 | length 57.6
  Top Layer w0.178: U2.12@39.268,66.173 39.268,63.133 39.925,62.476 39.925,53.72 42.387,51.258 47.148,51.258 52.199,56.309 52.199,59.814 52.958,60.574 64.61,60.574 65.352,61.316 v1(65.38,61.316)
  Bottom Layer w0.178: v1(65.38,61.316) 65.38,68.449 66.101,69.171 68.389,69.171 J4.8@69.59,70.372
PC4: J4.10 U2.24 | length 35.7
  Top Layer w0.178: U2.24@42.085,69.356 43.158,69.356 44.137,68.377 48.305,68.377 53.614,63.069 64.577,63.069 65.542,64.034 70.148,64.034 70.91,64.796 70.91,66.511 J4.10@69.59,67.832
PC5: J4.12 U2.25 | length 30.1
  Top Layer w0.178: U2.25@42.085,69.756 43.225,69.756 44.273,68.707 48.442,68.707 51.584,65.565 64.517,65.565 65.424,66.472 68.409,66.472 J4.12@69.59,65.292
PC6: J4.14 R14.1 U2.39 | length 59.4
  Top Layer w0.178: U2.39@39.668,74.138 39.668,74.913 43.024,78.27 50.848,78.27 51.734,77.385 R14.1@51.759,77.385 51.733,77.41 v1(51.733,78.181)
  Bottom Layer w0.178: v1(51.733,78.181) 51.733,81.139 55.059,84.464 66.865,84.464 71.643,79.687 71.643,64.805 J4.14@69.59,62.752
PC7: J4.16 R13.1 U2.40 | length 65.9
  Top Layer w0.178: U2.40@39.268,74.138 39.268,74.98 43.205,78.918 v1(50.463,78.918) 52.288,78.918 53.194,78.012 53.194,77.533 R13.1@53.342,77.385
  Bottom Layer w0.178: v1(50.463,78.918) 50.463,80.336 55.152,85.024 67.772,85.024 72.22,80.576 72.22,62.841 J4.16@69.59,60.212
PC8: J4.18 R12.1 U2.41 | length 73.6
  Top Layer w0.178: U2.41@38.868,74.138 38.868,75.047 43.399,79.578 54.426,79.578 55.281,78.723 R12.1@55.281,77.385
  Bottom Layer w0.178: v1(49.6,79.578) 49.6,80.383 54.592,85.375 68.554,85.375 72.857,81.072 72.857,60.939 J4.18@69.59,57.672
PC9: J4.20 R11.1 U2.42 | length 80.1
  Top Layer w0.178: U2.42@38.468,74.138 38.468,75.114 43.617,80.264 v1(48.812,80.264) 48.868,80.319 55.031,80.319 56.864,78.486 R11.1@56.864,77.385
  Bottom Layer w0.178: v1(48.812,80.264) 54.329,85.781 68.953,85.781 73.62,81.114 73.62,59.161 J4.20@69.59,55.132
PC10: J4.22 U2.54 | length 124.4
  Top Layer w0.178: U2.54@34.05,72.556 24.458,72.556 16.901,64.999 16.901,45.661 33.349,29.213 68.884,29.213 72.377,32.706 72.377,49.804 J4.22@69.59,52.592
PC11: J4.24 U2.55 | length 120
  Top Layer w0.178: U2.55@34.05,72.156 24.525,72.156 17.267,64.897 17.267,45.838 33.562,29.543 68.747,29.543 72.047,32.843 72.047,47.594 J4.24@69.59,50.052
PC12: J4.26 U2.56 | length 115.3
  Top Layer w0.178: U2.56@34.05,71.756 24.592,71.756 17.639,64.803 17.639,46.008 33.774,29.873 68.61,29.873 71.45,32.713 71.45,45.651 J4.26@69.59,47.512
PC13: J4.28 U2.2 | length 78
  Top Layer w0.178: U2.2@35.268,66.173 35.268,65.272 33.076,63.08 25.953,63.08 23.933,61.061 23.933,57.767 22.477,56.31 22.477,51.758 29.148,45.087 52.992,45.087 56.602,48.697 67.916,48.697 68.345,48.268 68.345,46.217 J4.28@69.59,44.972
PC14: J3.11 R5.1 | length 28.7
  Top Layer w0.203: v2(24.904,60.424) 24.904,57.307 26.026,56.185 R5.1@27.041,56.185
  Bottom Layer w0.203: J3.11@6.09,70.372 7.342,69.12 16.195,69.12 24.89,60.424 v2(24.904,60.424)
PC15: J3.13 R6.1 | length 32.4
  Top Layer w0.203: v1(24.877,55.396) 25.258,55.016 29.381,55.016 30.172,55.807 30.172,55.822 30.535,56.185 R6.1@30.56,56.185
  Bottom Layer w0.203: J3.13@6.09,67.832 7.292,66.63 17.292,66.63 24.523,59.399 24.523,55.751 v1(24.877,55.396)
PD0: J3.15 R3.1 | length 37
  Top Layer w0.203: v1(25.235,53.565) 31.961,53.565 34.193,55.797 34.193,55.822 34.556,56.185 R3.1@34.581,56.185
  Bottom Layer w0.203: J3.15@6.09,65.292 7.319,64.062 19.047,64.062 24.089,59.021 24.089,54.712 v1(25.235,53.565)
PD1: J3.17 R4.1 | length 40.9
  Top Layer w0.203: v1(24.436,52.451) 25.651,51.237 31.595,51.237 36.156,55.797 36.156,55.822 36.519,56.185 R4.1@36.544,56.185
  Bottom Layer w0.203: J3.17@6.09,62.752 7.457,61.384 14.8,61.384 15.552,62.137 19.784,62.137 22.636,59.286 22.636,54.942 24.436,53.142 v1(24.436,52.451)
PD2: J3.19 U2.57 | length 35.7
  Top Layer w0.178: v1(18.279,61.368) 18.279,64.975 24.659,71.356 U2.57@34.05,71.356
  Bottom Layer w0.178: J3.19@6.09,60.212 7.348,58.954 15.865,58.954 v1(18.279,61.368)
PD3: J3.21 U2.66 | length 36
  Top Layer w0.178: v1(21.844,57.76) 22.615,58.53 22.615,63.337 27.034,67.756 U2.66@34.05,67.756
  Bottom Layer w0.178: J3.21@6.09,57.672 7.322,56.439 20.524,56.439 v1(21.844,57.76)
PD4: J3.23 U2.18 | length 57.1
  Top Layer w0.178: U2.18@42.085,66.956 42.756,66.956 43.392,66.32 45.567,66.32 46.564,65.323 v2(46.564,61.382)
  Bottom Layer w0.178: J3.23@6.09,55.132 7.322,53.899 17.432,53.899 20.374,50.958 36.614,50.958 42.772,57.116 42.772,59.685 44.468,61.382 v2(46.564,61.382)
PD5: J3.25 U2.33 | length 118.9
  Top Layer w0.178: U2.33@42.085,72.956 42.7,72.956 43.22,73.476 43.22,74.649 43.769,75.198 47.456,75.198 51.373,71.281 v1(52.927,71.281)
  Bottom Layer w0.178: J3.25@6.09,52.592 3.651,50.153 3.651,30.104 8.16,25.595 24.763,25.595 54.149,54.981 54.149,61.696 52.927,62.918 v1(52.927,71.281)
PD6: J3.27 U2.34 | length 114.7
  Top Layer w0.178: U2.34@42.085,73.356 42.592,73.356 42.866,73.629 42.866,74.762 43.632,75.528 47.593,75.528 51.188,71.933 v1(52.24,71.933)
  Bottom Layer w0.178: J3.27@6.09,50.052 4.311,48.273 4.311,29.911 8.297,25.925 24.626,25.925 53.717,55.016 53.717,61.363 52.24,62.84 v1(52.24,71.933)
V5V: C1.1 S1.2 U1.3 | length 26
  Top Layer w0.762: U1.3@65.454,24.08 65.527,24.008 U1.3@67.279,24.008 ; U1.3@67.279,24.008 68.051,23.237 v2(68.051,22.835) 68.147,22.932 68.646,22.932 69.027,23.313 C1.1@69.027,23.44 68.785,23.682 v2(68.129,23.682) 67.803,24.008 U1.3@67.279,24.008
  Bottom Layer w0.762: S1.2@81.3,18.388 81.251,18.437 81.251,21.713 79.282,23.682 68.491,23.682 ; 68.491,23.682 v2(68.129,23.682) 68.051,23.604 v2(68.051,22.835) 68.694,23.479 68.491,23.682
VBAT: C6.1 J4.36 P4.6 U2.1 | length 110.6
  Top Layer w0.381: C6.1@32.943,64.776 33.764,64.776 34.781,65.792
  Top Layer w0.508: C6.1@32.726,64.706 32.726,63.888 32.417,63.579 25.147,63.579 23.383,61.815 23.383,57.99 21.898,56.505 21.898,50.811 28.546,44.163 54.597,44.163 56.961,46.527 57.979,46.527 ; v2@58.778,46.164 58.342,46.164 57.979,46.527 ; v2@58.906,46.292 58.709,46.488 58.453,46.488 58.414,46.527 v2(58.359,46.527) 57.979,46.527 ; v2@59.034,46.164 59.073,46.125 v2(59.128,46.125)
  Bottom Layer w0.559: v2(59.128,46.125) 59.087,46.125 58.713,46.498 v2@58.43,46.498 ; P4.6@80.554,32.322 79.271,33.606 76.07,33.606 74.864,34.812 J4.36@69.59,34.812 68.269,33.491 65.635,33.491 65.022,32.878 65.022,31.06 64.161,30.198 59.797,30.198 59.05,30.945 v2@59.05,45.795 ; v2@58.359,46.486 v2@59.05,45.795 ; v2@58.359,46.486 58.372,46.498 v2@58.43,46.498 ; v2@58.359,46.486 v2(58.359,46.527) 58.401,46.527 v2@58.43,46.498 ; v2@58.43,46.498 58.803,46.125 59.05,46.125 v2@59.05,45.795
VDD: C4.1 C10.2 J3.1 J3.2 P3.8 P4.4 P6.7 P6.8 S4.1 U2.32 U2.68 | length 199.4
  Top Layer w0.178: C4.1@29.875,66.291 C4.1@29.909,66.325 ; U2.68@34.05,66.956 33.45,66.956 ; U2.32@42.085,72.556 45.294,72.556 C10.2@45.815,73.077 ; C4.1@29.909,66.325 32.819,66.325 33.45,66.956 ; C4.1@29.909,66.325 30.053,66.469 32.795,66.469 33.282,66.956 33.45,66.956
  Top Layer w0.762: J3.1@6.09,83.072 J3.2@8.63,83.072 ; v2(45.771,73.892) 45.771,73.134 45.822,73.083 C10.2@45.815,73.077 ; v2@67.464,86.724 v2(67.464,86.674) ; P6.7@78.014,57.672 P6.8@80.554,57.672 82.302,57.672 83.423,58.793 83.423,63.133 S4.1@83.423,74.499 83.43,74.505 83.43,75.339 ; 83.423,75.339 83.423,75.809 81.865,77.367 74.54,77.367 67.464,84.444 67.464,85.855 ; 67.464,85.855 v2(66.603,86.715) 67.422,86.715 v2(67.464,86.674) ; 67.464,85.855 v2(67.464,86.674)
  Bottom Layer w0.635: J3.1@6.09,83.072 J3.2@8.63,83.072 19.356,83.072 20.326,82.102 22.039,80.388 22.039,75.906 23.572,74.373 29.34,74.373 30.617,73.097 30.617,66.448 30.596,66.427 v2@30.57,66.427 ; v2@30.482,66.514 28.193,64.225 28.193,57.395 30.405,55.183 37.18,55.183 39.211,57.213 39.211,60.056 42.697,63.543 42.697,70.823 45.766,73.892 v2(45.771,73.892)
  Bottom Layer w0.762: v2(45.771,73.892) 45.757,73.906 45.757,74.138 45.757,75.124 45.757,79.541 52.889,86.674 66.603,86.674 v2(67.464,86.674) ; P4.4@80.554,34.862 81.413,34.862 82.135,35.585 82.135,41.895 81.867,42.163 ; P3.8@80.554,42.432 81.599,42.432 82.135,42.968 82.135,57.337 81.801,57.672 P6.8@80.554,57.672
  other v2: 30.605,66.413
VDDA: C18.1 J4.5 J7.3 R20.2 U2.13 | length 212.1
  Top Layer w0.178: U2.13@39.668,66.173 39.668,65.155 ; C18.1@41.291,61.391 41.291,63.332 39.668,64.955 39.668,65.155 ; C18.1@41.507,61.516 41.431,61.592 41.431,63.392 39.668,65.155
  Top Layer w0.508: 34.358,21.106 24.769,30.695 24.769,30.706 23.172,32.303 ; C18.1@41.291,61.391 41.49,61.192 42.109,61.192 42.449,60.852 42.449,54.277 43.691,53.035 44.492,53.035 ; v2@45.256,52.403 45.256,52.625 45.256,53 45.291,53.035 ; 45.399,52.625 v2@45.399,52.546 ; v2@66.397,15.421 66.475,15.498 R20.2@68.939,15.498 ; v2@22.544,32.931 23.172,32.303 ; v2@22.544,32.931 v2(22.505,32.97) 22.505,32.943 21.927,32.364 v2(21.927,32.338) 21.961,32.303 22.567,32.303 ; v2@22.544,32.931 22.544,32.325 22.567,32.303 ; 22.567,32.303 23.172,32.303 ; 44.492,53.035 45.079,52.448 45.217,52.31 45.217,52.346 45.399,52.527 v2@45.399,52.546 ; 44.492,53.035 45.291,53.035 ; 45.291,53.035 45.753,53.035 45.714,52.996 45.714,52.862 v2@45.399,52.546
  Top Layer w0.559: 34.358,21.106 53.674,21.106 57.742,17.038 60.332,17.038 62.293,15.076 65.663,15.076 66.008,15.421 v2(66.049,15.421) 66.397,15.421 v2@66.787,15.421 ; J4.5@67.05,72.912 68.325,74.187 70.83,74.187 75.982,69.034 77.19,69.034 ; v2(77.95,68.274) v2@77.932,68.292 ; 77.19,69.034 v2@77.932,68.292 ; 77.19,69.034 v2(77.914,69.034) 77.932,69.016 v2@77.932,68.292
  Top Layer w0.762: J7.3@61.97,71.896 64.075,71.896 65.091,72.912 J4.5@67.05,72.912
  Bottom Layer w0.508: v2(21.927,32.338) 21.927,32.391 v2(22.505,32.97) 33.615,44.08 36.987,44.08 v2@45.217,52.31 ; v2@45.307,52.457 v2@45.765,52.916 ; v2@45.714,52.862 v2@45.256,52.403 ; v2@45.217,52.31 45.256,52.348 v2@45.256,52.403 ; v2@45.217,52.31 45.217,52.365 v2@45.256,52.403
  Bottom Layer w0.559: v2(77.914,69.034) v2@77.932,69.016 ; v2@77.924,68.247 v2(77.95,68.274) ; 66.049,16.211 v2(66.787,15.473) 66.761,15.447 66.075,15.447 v2(66.049,15.421) 66.049,16.211 ; 66.049,16.211 66.049,24.28 67.761,25.993 81.869,25.993 83.687,27.81 83.687,66.147 81.56,68.274 78.674,68.274 ; v2@77.932,69.016 78.674,68.274 ; v2@77.932,69.016 77.932,68.292 v2(77.95,68.274) ; v2(77.95,68.274) 78.674,68.274
  other v2: 45.268,52.284 45.855,52.933
VINTA: C7.1 U2.50 | length 5.3
  Top Layer w0.178: U2.50@35.268,74.138 35.268,76.391 36.149,77.272 C7.1@36.149,79.104
VIO: C5.2 C8.1 C9.1 P4.2 R20.1 U2.17 U2.31 U2.67 | length 207.3
  Top Layer w0.178: C5.2@28.252,66.291 28.277,66.291 29.205,67.218 ; C5.2@28.274,66.497 29.133,67.356 29.342,67.356 ; U2.67@34.05,67.356 32.746,67.356 ; U2.17@41.268,66.173 41.272,66.169 41.272,65.758 42.355,64.674 ; U2.31@42.085,72.156 44.546,72.156 45.24,71.461 45.8,71.461 45.807,71.468 C9.1@45.815,71.476 ; C8.1@43.6,64.7 C8.1@43.625,64.674 ; C8.1@43.758,64.542 C8.1@43.625,64.674 ; C8.1@43.981,64.674 43.783,64.674 C8.1@43.625,64.674 ; C8.1@44.113,64.516 42.513,64.516 42.355,64.674 ; 29.205,67.218 29.342,67.356 ; 29.205,67.218 32.609,67.218 32.746,67.356 ; 29.342,67.356 32.746,67.356 ; 42.355,64.674 C8.1@43.625,64.674
  Top Layer w0.508: v2@45.24,71.461 45.248,71.468 C9.1@45.807,71.468
  Top Layer w0.635: v2(27.347,66.215) 27.362,66.23 28.356,66.23 C5.2@28.423,66.297
  Top Layer w0.762: v2(22.812,29.698) 22.922,29.698 v2(23.461,29.159) 33.1,19.52 53.8,19.52 57.463,15.856 59.77,15.856 62.537,13.089 69.32,13.089 70.537,14.307 70.537,15.582 70.563,15.607 70.588,15.607 71.78,16.8 71.78,20.411 74.647,23.278 74.647,26.42 76.538,28.312 79.067,28.312 82.397,31.642 82.397,36.81 81.951,37.257 80.7,37.257 P4.2@80.554,37.402 ; C8.1@43.758,64.694 43.783,64.72 43.783,64.674 C8.1@43.783,64.568 ; C8.1@43.783,64.669 v2@43.783,65.118
  Bottom Layer w0.635: v2(27.347,66.215) 27.347,66.207 26.771,65.631 26.771,57.015 29.675,54.112 37.792,54.112 40.417,56.737 40.417,59.748 43.783,63.115 43.783,64.68 ; 43.783,65.524 43.783,65.169 43.783,64.68 ; 44.628,65.524 43.783,64.68
  Bottom Layer w0.762: v2(22.812,29.698) 22.812,29.677 v2@22.819,29.671 ; v2(45.169,71.461) 43.783,70.075 43.783,66.369 ; v2@22.819,29.671 23.461,30.312 ; v2@22.819,29.671 23.33,29.159 v2(23.461,29.159) 23.461,30.312 ; 23.461,30.312 34.802,41.653 37.057,41.653 49.047,53.644 49.047,62.405 45.928,65.524 44.628,65.524 ; 43.783,66.369 43.783,65.524 44.628,65.524 ; 43.783,66.369 44.628,65.524
  other v2: 43.783,65.143
X32IN: C13.2 R5.2 U2.3 Y2.1 | length 14
  Top Layer w0.178: R5.2@27.321,57.725 28.782,57.725 28.804,57.747 28.804,59.686 29.534,60.416 29.534,61.189 31.046,62.701 33.171,62.701 35.668,65.197 U2.3@35.668,66.173
X32OUT: C14.2 R6.2 U2.4 Y2.2 | length 12.2
  Top Layer w0.178: R6.2@30.154,57.725 32.034,57.725 Y2.2@32.034,60.935 32.034,61.403 32.988,62.357 33.367,62.357 36.068,65.058 U2.4@36.068,66.173
XIN: R3.2 U2.6 Y1.1 | length 9.7
  Top Layer w0.178: Y1.1@34.183,59.462 Y1.1@34.283,59.462 34.283,58.023 R3.2@34.581,57.725 ; Y1.1@34.436,59.462 34.536,59.462 35.376,60.302 35.376,62.205 36.868,63.697 U2.6@36.868,66.173
XOUT: R4.2 U2.7 Y1.3 | length 9.6
  Top Layer w0.178: R4.2@36.61,57.725 37.585,58.701 37.585,60.46 37.144,60.901 36.683,61.362 Y1.3@36.583,61.362 36.583,62.643 37.268,63.327 U2.7@37.268,66.173
pads on no net: J1.A8 J1.B8 J3.30 J4.21 P2. P2.7 S1.0 S1.3 U1.

## Polygon pours and split planes (outlines as drawn)
GND on Bottom Layer "GND" (hatched Horizontal grid 0.203 track 0.203, remove dead copper, pour order 7): 0,95 0,0 86.5,0 86.5,95
GND on Top Layer "GND" (hatched Horizontal grid 0.203 track 0.203, remove dead copper, pour order 3): 0,95 0,0 86.5,0 86.5,95

## Keep-outs
Keep-Out Layer:
  the board outline again, w0.254

## Other copper
Top Layer:
  rectangle net GND: 34.841,66.831 36.379,73.018
  rectangle net GND: 34.77,66.857 41.37,73.457
  rectangle net GND: 30.48,74.913 32.654,77.53
  rectangle net GND: 33.777,80.488 35.712,82.449
  rectangle net GND: 34.841,66.831 41.294,72.563
  rectangle net GND: 34.21,88.053 35.11,88.999
  rectangle net GND: 33.898,88.236 36.252,88.9
  region net GND: 36.153,73.018 36.725,73.018 36.973,72.77 37.535,72.77 37.815,72.489 37.815,72.15 36.393,72.15 36.153,72.15
  pour cut-out: 34.488,73.536 34.488,66.62 41.658,66.62 41.658,73.519 41.59,73.519
  pour cut-out: 32.555,80.543 32.555,78.18 33.774,78.18 33.774,80.556
Bottom Layer:
  rectangle net GND: 36.074,68.26 39.973,72.048
Multi-Layer:
  pour cut-out: 86.505,88.799 0,88.799 0,95 86.505,95